# Altium PCB Copy of ACDC.PcbDoc (part 1 of 2)
Units mil, origin at the board's own origin, x right, y up, seen from the top; angles counter-clockwise.
Board outline 4750 x 3250 mil, 4 copper layers (Top Layer, Layer 1, Layer 2, Bottom Layer), stack 23.756 mil thick; 131 components, 94 nets, 665 pads, 112 vias.
Unrouted connection lines stored in the file: 74.
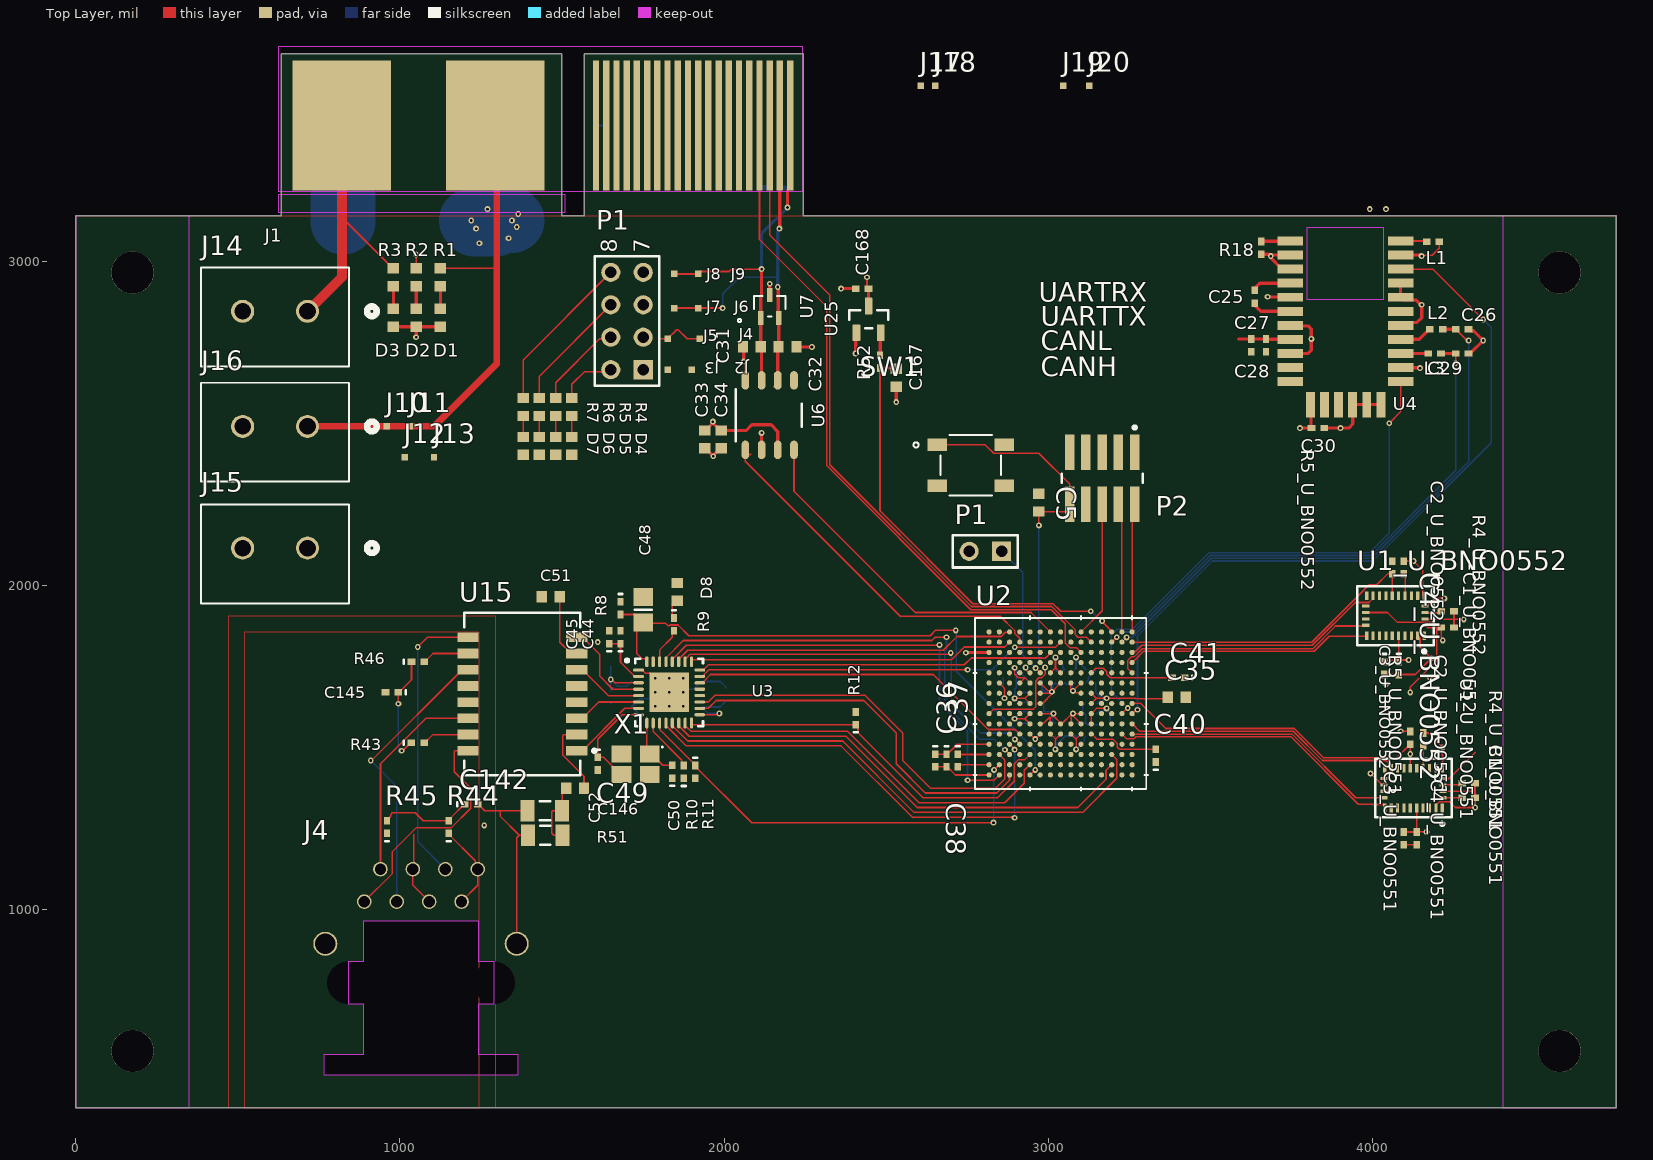
[diagram p0: Top Layer view]
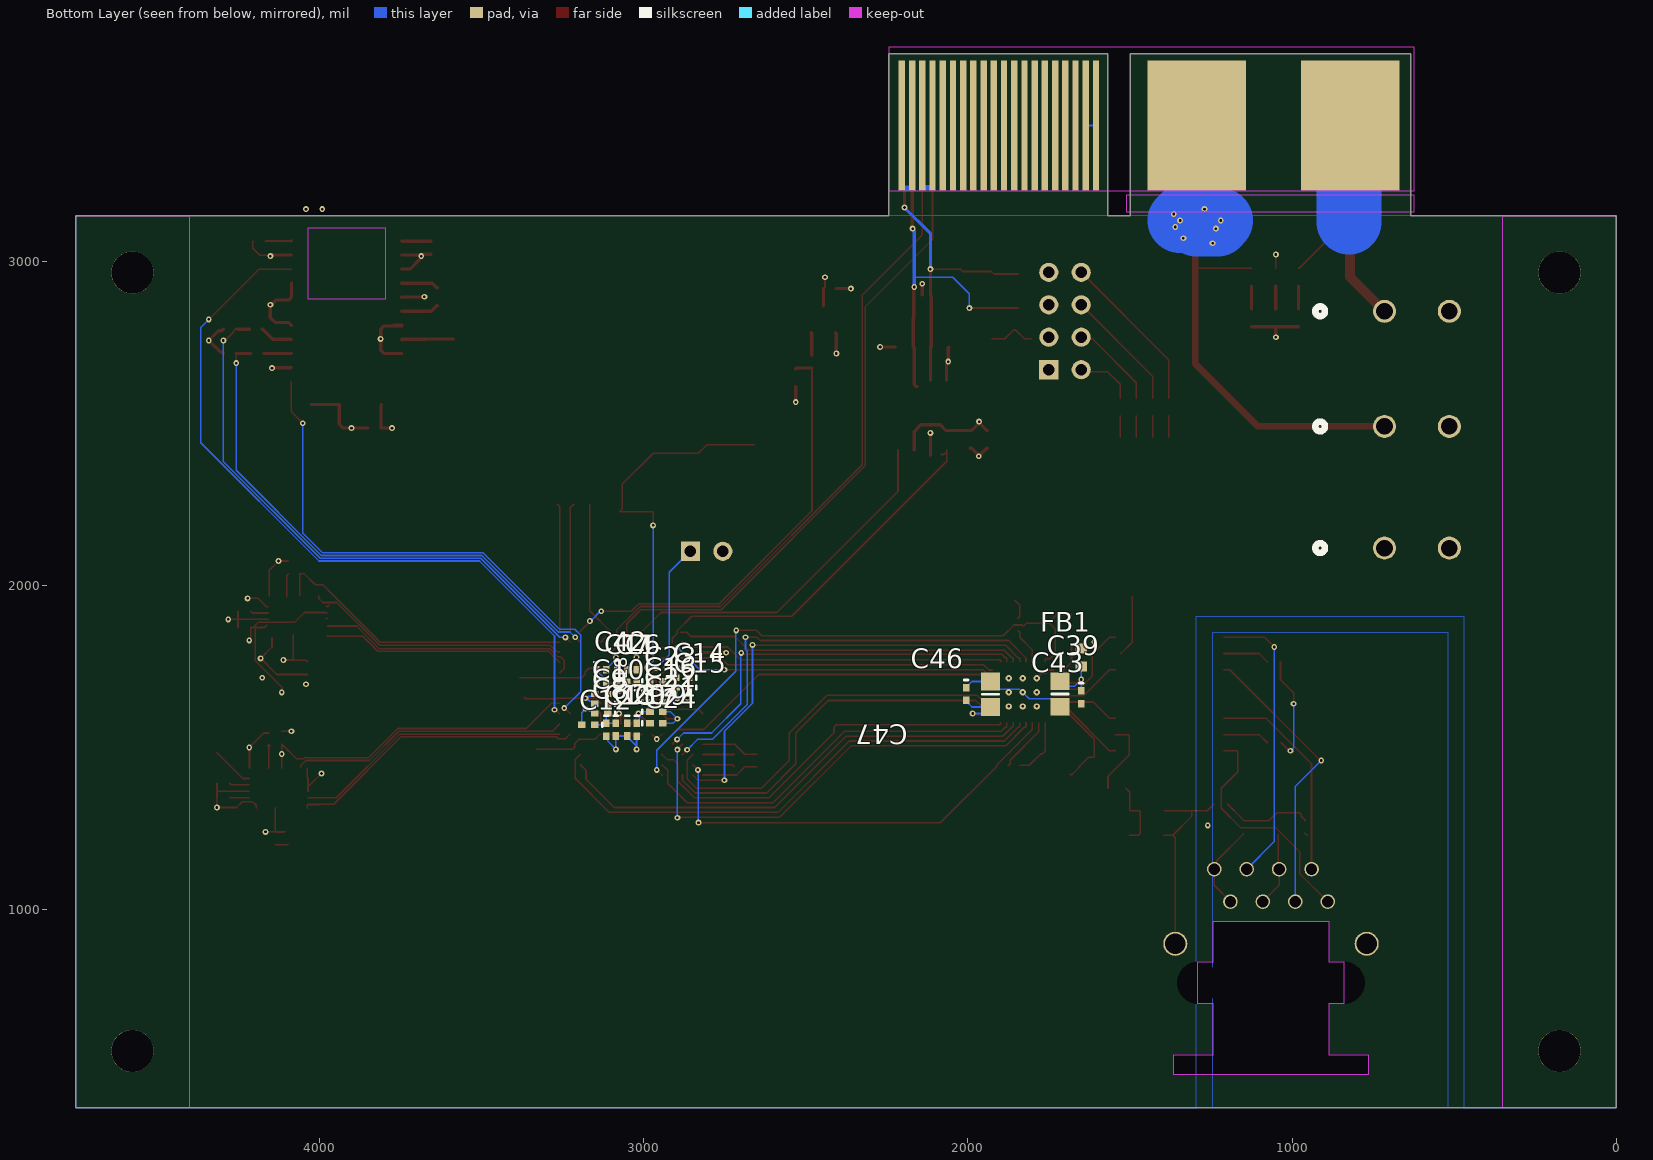
[diagram p1: Bottom Layer view, seen from below]
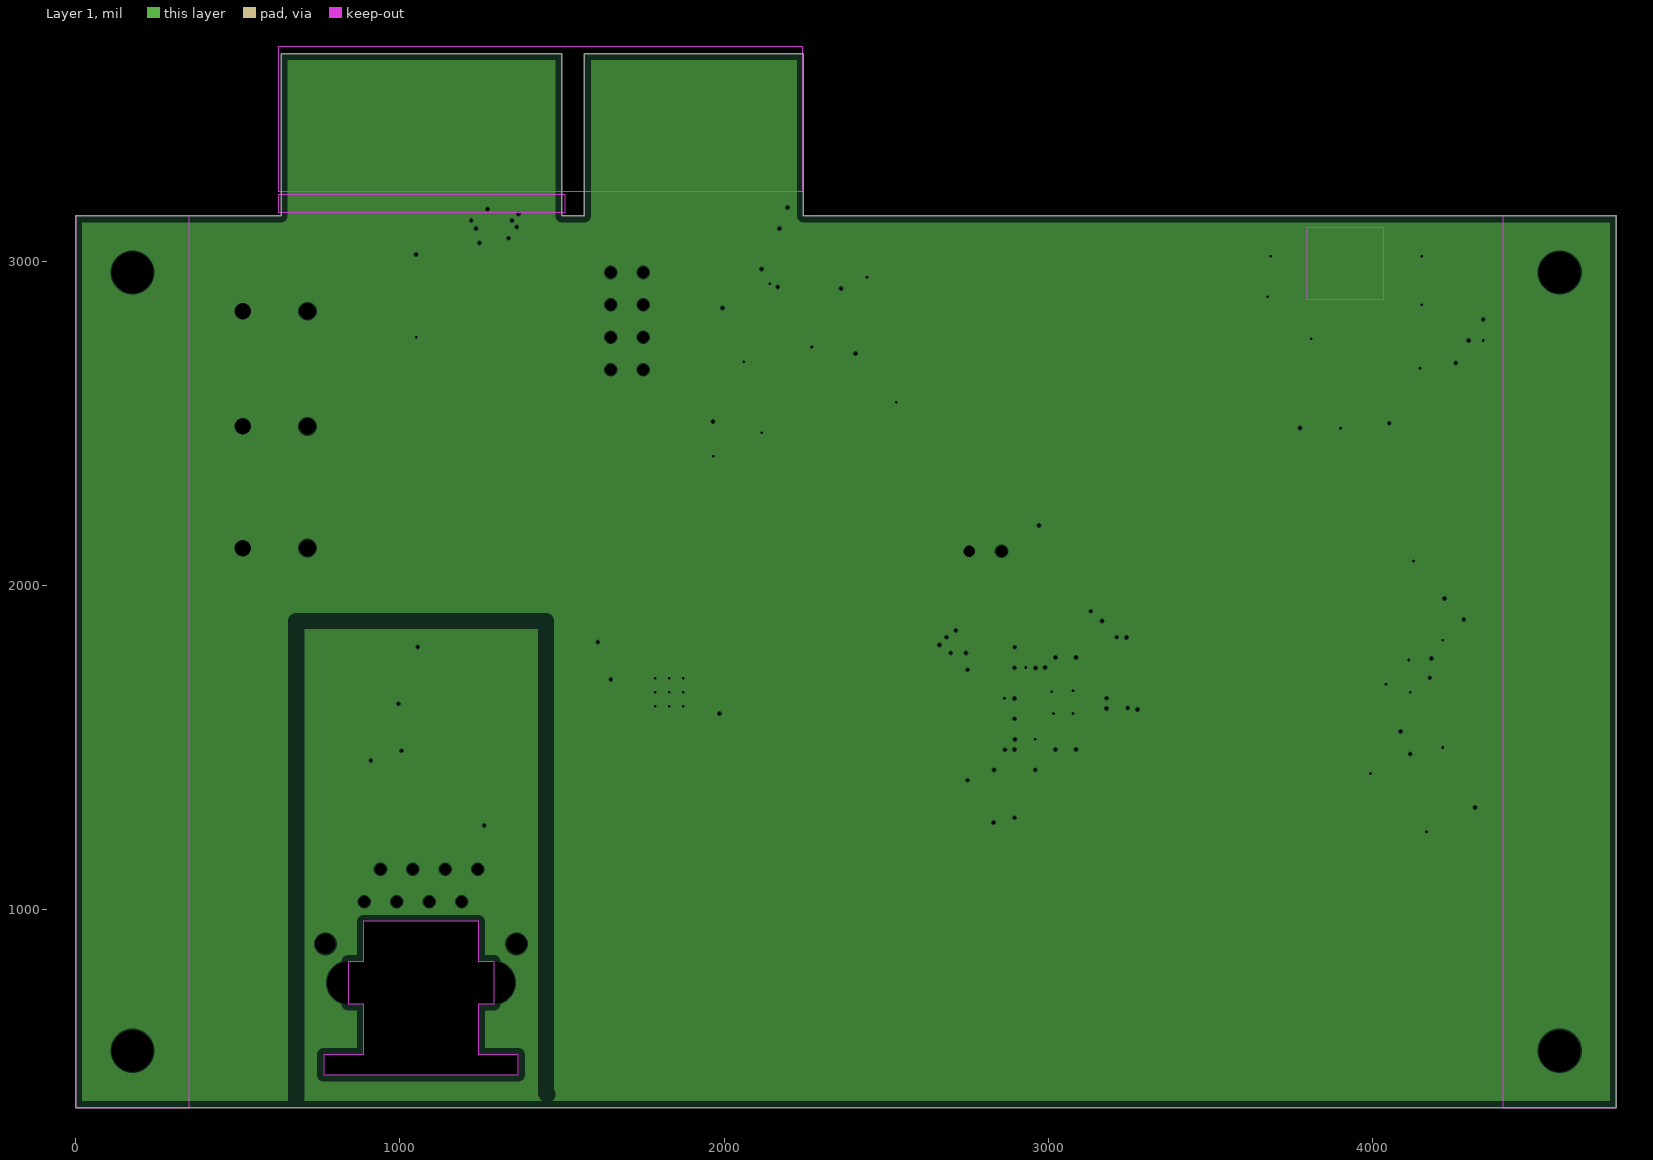
[diagram p2: Layer 1, clearances drawn from the general rule]
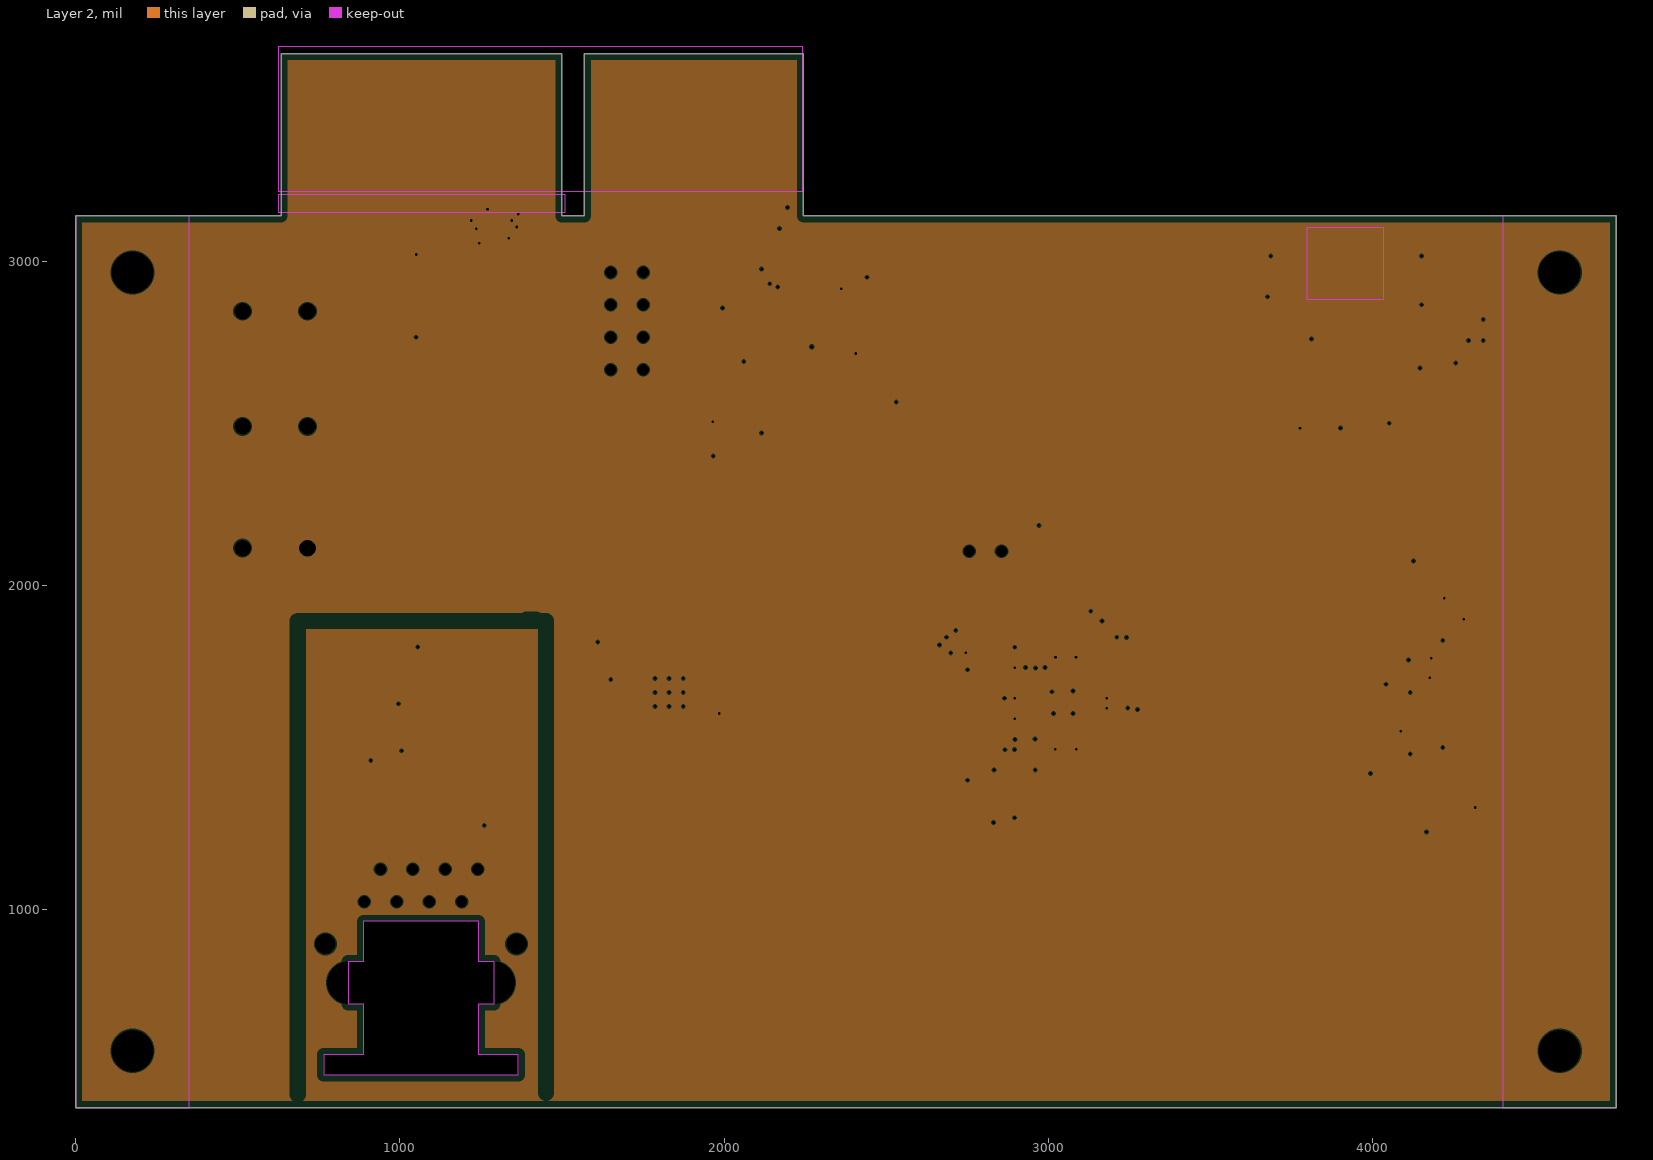
[diagram p3: Layer 2, clearances drawn from the general rule]

## Layer stack, top to bottom
Top Solder: solder mask 0.4, Solder Resist, Dk 3.5
Top Layer: signal copper 1.4
Dielectric 2: prepreg 2.8, PP-006, Dk 4.1
Layer 1: plane copper 1.378, net GND
Dielectric 1: dielectric 12.6, FR-4, Dk 4.8
Layer 2: plane copper 1.378, net 3V3
Dielectric 3: prepreg 2.8, PP-006, Dk 4.1
Bottom Layer: signal copper 1.4
Bottom Solder: solder mask 0.4, Solder Resist, Dk 3.5

## Board outline
0.5,389.5 0.5,3139.5 633.87,3139.5 633.87,3639.5 1498.87,3639.5 1498.87,3139.5 1568.87,3139.5 1568.87,3639.5 2243.86,3639.5 2243.86,3139.5 4750.5,3139.5 4750.5,389.5

## Design rules (kind name [scope] priority, off if disabled: settings)
BoardOutlineClearance [All] p1: gap=7.87 ignorepadtopadclearanceinfootprint=FALSE
Clearance [All] p1: gap=3.54 ignorepadtopadclearanceinfootprint=FALSE except(5: Arc-Via Track-Via SMDPad-Via THPad-Via Via-Via Via-Fill Via-Poly Via-Region Via-Text; 9.84: Arc-Hole Track-Hole SMDPad-Hole THPad-Hole Via-Hole Fill-Hole Poly-Hole Region-Hole Text-Hole)
ComponentClearance [All] p1: gap=3.5 collisioncheckmode=3 verticalgap=3.5 showdistances=TRUE
DiffPairsRouting 120OhmDiffPairs [InDifferentialPairClass('120Ohm')] p1: maxlimit=5 minlimit=5 mostfreqgap=5 substack1={5B3CBE88-527F-45CC-934D-B3D730501180} toplayer_{5b3cbe88-527f-45cc-934d-b3d730501180}_minwidth=15 toplayer_{5b3cbe88-527f-45cc-934d-b3d730501180}_maxwidth=15 toplayer_{5b3cbe88-527f-45cc-934d-b3d730501180}_prefwidth=15 bottomlayer_{5b3cbe88-527f-45cc-934d-b3d730501180}_minwidth=15 bottomlayer_{5b3cbe88-527f-45cc-934d-b3d730501180}_maxwidth=15 bottomlayer_{5b3cbe88-527f-45cc-934d-b3d730501180}_prefwidth=15 toplayer_minwidth=2.63 toplayer_maxwidth=2.63 toplayer_prefwidth=2.63 bottomlayer_minwidth=2.63 bottomlayer_maxwidth=2.63 bottomlayer_prefwidth=2.63 substack2={8099F0E5-E8A4-4C0B-B981-DA392BF8B1DC} toplayer_{8099f0e5-e8a4-4c0b-b981-da392bf8b1dc}_minwidth=15 toplayer_{8099f0e5-e8a4-4c0b-b981-da392bf8b1dc}_maxwidth=15 toplayer_{8099f0e5-e8a4-4c0b-b981-da392bf8b1dc}_prefwidth=15 bottomlayer_{8099f0e5-e8a4-4c0b-b981-da392bf8b1dc}_minwidth=15 bottomlayer_{8099f0e5-e8a4-4c0b-b981-da392bf8b1dc}_maxwidth=15 bottomlayer_{8099f0e5-e8a4-4c0b-b981-da392bf8b1dc}_prefwidth=15 substack3={670BDCB0-0926-4304-8001-FDB9BD357462} toplayer_{670bdcb0-0926-4304-8001-fdb9bd357462}_minwidth=15 toplayer_{670bdcb0-0926-4304-8001-fdb9bd357462}_maxwidth=15 toplayer_{670bdcb0-0926-4304-8001-fdb9bd357462}_prefwidth=15 bottomlayer_{670bdcb0-0926-4304-8001-fdb9bd357462}_minwidth=15 bottomlayer_{670bdcb0-0926-4304-8001-fdb9bd357462}_maxwidth=15 bottomlayer_{670bdcb0-0926-4304-8001-fdb9bd357462}_prefwidth=15 substack4={A201DB0F-6F31-4885-A301-8523EAE111D3} toplayer_{a201db0f-6f31-4885-a301-8523eae111d3}_minwidth=15 toplayer_{a201db0f-6f31-4885-a301-8523eae111d3}_maxwidth=15 toplayer_{a201db0f-6f31-4885-a301-8523eae111d3}_prefwidth=15 bottomlayer_{a201db0f-6f31-4885-a301-8523eae111d3}_minwidth=15 bottomlayer_{a201db0f-6f31-4885-a301-8523eae111d3}_maxwidth=15 bottomlayer_{a201db0f-6f31-4885-a301-8523eae111d3}_prefwidth=15 impedanceprofiledriven=TRUE impedanceprofileid={E287B070-1990-45AA-885F-49F5262516A6} maxuncoupledlength=500
DiffPairsRouting 100OhmDiffPairs [InDifferentialPairClass('100Ohm')] p2: maxlimit=5 minlimit=5 mostfreqgap=5 substack1={5B3CBE88-527F-45CC-934D-B3D730501180} toplayer_{5b3cbe88-527f-45cc-934d-b3d730501180}_minwidth=15 toplayer_{5b3cbe88-527f-45cc-934d-b3d730501180}_maxwidth=15 toplayer_{5b3cbe88-527f-45cc-934d-b3d730501180}_prefwidth=15 bottomlayer_{5b3cbe88-527f-45cc-934d-b3d730501180}_minwidth=15 bottomlayer_{5b3cbe88-527f-45cc-934d-b3d730501180}_maxwidth=15 bottomlayer_{5b3cbe88-527f-45cc-934d-b3d730501180}_prefwidth=15 toplayer_minwidth=4.51 toplayer_maxwidth=4.51 toplayer_prefwidth=4.51 bottomlayer_minwidth=4.51 bottomlayer_maxwidth=4.51 bottomlayer_prefwidth=4.51 substack2={8099F0E5-E8A4-4C0B-B981-DA392BF8B1DC} toplayer_{8099f0e5-e8a4-4c0b-b981-da392bf8b1dc}_minwidth=15 toplayer_{8099f0e5-e8a4-4c0b-b981-da392bf8b1dc}_maxwidth=15 toplayer_{8099f0e5-e8a4-4c0b-b981-da392bf8b1dc}_prefwidth=15 bottomlayer_{8099f0e5-e8a4-4c0b-b981-da392bf8b1dc}_minwidth=15 bottomlayer_{8099f0e5-e8a4-4c0b-b981-da392bf8b1dc}_maxwidth=15 bottomlayer_{8099f0e5-e8a4-4c0b-b981-da392bf8b1dc}_prefwidth=15 substack3={670BDCB0-0926-4304-8001-FDB9BD357462} toplayer_{670bdcb0-0926-4304-8001-fdb9bd357462}_minwidth=15 toplayer_{670bdcb0-0926-4304-8001-fdb9bd357462}_maxwidth=15 toplayer_{670bdcb0-0926-4304-8001-fdb9bd357462}_prefwidth=15 bottomlayer_{670bdcb0-0926-4304-8001-fdb9bd357462}_minwidth=15 bottomlayer_{670bdcb0-0926-4304-8001-fdb9bd357462}_maxwidth=15 bottomlayer_{670bdcb0-0926-4304-8001-fdb9bd357462}_prefwidth=15 substack4={A201DB0F-6F31-4885-A301-8523EAE111D3} toplayer_{a201db0f-6f31-4885-a301-8523eae111d3}_minwidth=15 toplayer_{a201db0f-6f31-4885-a301-8523eae111d3}_maxwidth=15 toplayer_{a201db0f-6f31-4885-a301-8523eae111d3}_prefwidth=15 bottomlayer_{a201db0f-6f31-4885-a301-8523eae111d3}_minwidth=15 bottomlayer_{a201db0f-6f31-4885-a301-8523eae111d3}_maxwidth=15 bottomlayer_{a201db0f-6f31-4885-a301-8523eae111d3}_prefwidth=15 impedanceprofiledriven=TRUE impedanceprofileid={2AE41D91-29D4-4592-BCE6-4F755B01D198} maxuncoupledlength=500
DiffPairsRouting 90OhmDiffPairs [InDifferentialPairClass('90Ohm')] p3: maxlimit=5 minlimit=5 mostfreqgap=5 substack1={5B3CBE88-527F-45CC-934D-B3D730501180} toplayer_{5b3cbe88-527f-45cc-934d-b3d730501180}_minwidth=15 toplayer_{5b3cbe88-527f-45cc-934d-b3d730501180}_maxwidth=15 toplayer_{5b3cbe88-527f-45cc-934d-b3d730501180}_prefwidth=15 bottomlayer_{5b3cbe88-527f-45cc-934d-b3d730501180}_minwidth=15 bottomlayer_{5b3cbe88-527f-45cc-934d-b3d730501180}_maxwidth=15 bottomlayer_{5b3cbe88-527f-45cc-934d-b3d730501180}_prefwidth=15 toplayer_minwidth=5.85 toplayer_maxwidth=5.85 toplayer_prefwidth=5.85 bottomlayer_minwidth=5.85 bottomlayer_maxwidth=5.85 bottomlayer_prefwidth=5.85 substack2={8099F0E5-E8A4-4C0B-B981-DA392BF8B1DC} toplayer_{8099f0e5-e8a4-4c0b-b981-da392bf8b1dc}_minwidth=15 toplayer_{8099f0e5-e8a4-4c0b-b981-da392bf8b1dc}_maxwidth=15 toplayer_{8099f0e5-e8a4-4c0b-b981-da392bf8b1dc}_prefwidth=15 bottomlayer_{8099f0e5-e8a4-4c0b-b981-da392bf8b1dc}_minwidth=15 bottomlayer_{8099f0e5-e8a4-4c0b-b981-da392bf8b1dc}_maxwidth=15 bottomlayer_{8099f0e5-e8a4-4c0b-b981-da392bf8b1dc}_prefwidth=15 substack3={670BDCB0-0926-4304-8001-FDB9BD357462} toplayer_{670bdcb0-0926-4304-8001-fdb9bd357462}_minwidth=15 toplayer_{670bdcb0-0926-4304-8001-fdb9bd357462}_maxwidth=15 toplayer_{670bdcb0-0926-4304-8001-fdb9bd357462}_prefwidth=15 bottomlayer_{670bdcb0-0926-4304-8001-fdb9bd357462}_minwidth=15 bottomlayer_{670bdcb0-0926-4304-8001-fdb9bd357462}_maxwidth=15 bottomlayer_{670bdcb0-0926-4304-8001-fdb9bd357462}_prefwidth=15 substack4={A201DB0F-6F31-4885-A301-8523EAE111D3} toplayer_{a201db0f-6f31-4885-a301-8523eae111d3}_minwidth=15 toplayer_{a201db0f-6f31-4885-a301-8523eae111d3}_maxwidth=15 toplayer_{a201db0f-6f31-4885-a301-8523eae111d3}_prefwidth=15 bottomlayer_{a201db0f-6f31-4885-a301-8523eae111d3}_minwidth=15 bottomlayer_{a201db0f-6f31-4885-a301-8523eae111d3}_maxwidth=15 bottomlayer_{a201db0f-6f31-4885-a301-8523eae111d3}_prefwidth=15 impedanceprofiledriven=TRUE impedanceprofileid={0AC2A555-4B6F-4755-A2BA-0C0075E72B6B} maxuncoupledlength=500
DiffPairsRouting [All] p4: maxlimit=3.54 minlimit=3.54 mostfreqgap=3.54 substack1={5B3CBE88-527F-45CC-934D-B3D730501180} toplayer_{5b3cbe88-527f-45cc-934d-b3d730501180}_minwidth=15 toplayer_{5b3cbe88-527f-45cc-934d-b3d730501180}_maxwidth=15 toplayer_{5b3cbe88-527f-45cc-934d-b3d730501180}_prefwidth=15 bottomlayer_{5b3cbe88-527f-45cc-934d-b3d730501180}_minwidth=15 bottomlayer_{5b3cbe88-527f-45cc-934d-b3d730501180}_maxwidth=15 bottomlayer_{5b3cbe88-527f-45cc-934d-b3d730501180}_prefwidth=15 toplayer_minwidth=3.54 toplayer_maxwidth=71497.94 toplayer_prefwidth=3.54 bottomlayer_minwidth=3.54 bottomlayer_maxwidth=71497.94 bottomlayer_prefwidth=3.54 substack2={8099F0E5-E8A4-4C0B-B981-DA392BF8B1DC} toplayer_{8099f0e5-e8a4-4c0b-b981-da392bf8b1dc}_minwidth=15 toplayer_{8099f0e5-e8a4-4c0b-b981-da392bf8b1dc}_maxwidth=15 toplayer_{8099f0e5-e8a4-4c0b-b981-da392bf8b1dc}_prefwidth=15 bottomlayer_{8099f0e5-e8a4-4c0b-b981-da392bf8b1dc}_minwidth=15 bottomlayer_{8099f0e5-e8a4-4c0b-b981-da392bf8b1dc}_maxwidth=15 bottomlayer_{8099f0e5-e8a4-4c0b-b981-da392bf8b1dc}_prefwidth=15 substack3={670BDCB0-0926-4304-8001-FDB9BD357462} toplayer_{670bdcb0-0926-4304-8001-fdb9bd357462}_minwidth=15 toplayer_{670bdcb0-0926-4304-8001-fdb9bd357462}_maxwidth=15 toplayer_{670bdcb0-0926-4304-8001-fdb9bd357462}_prefwidth=15 bottomlayer_{670bdcb0-0926-4304-8001-fdb9bd357462}_minwidth=15 bottomlayer_{670bdcb0-0926-4304-8001-fdb9bd357462}_maxwidth=15 bottomlayer_{670bdcb0-0926-4304-8001-fdb9bd357462}_prefwidth=15 substack4={A201DB0F-6F31-4885-A301-8523EAE111D3} toplayer_{a201db0f-6f31-4885-a301-8523eae111d3}_minwidth=15 toplayer_{a201db0f-6f31-4885-a301-8523eae111d3}_maxwidth=15 toplayer_{a201db0f-6f31-4885-a301-8523eae111d3}_prefwidth=15 bottomlayer_{a201db0f-6f31-4885-a301-8523eae111d3}_minwidth=15 bottomlayer_{a201db0f-6f31-4885-a301-8523eae111d3}_maxwidth=15 bottomlayer_{a201db0f-6f31-4885-a301-8523eae111d3}_prefwidth=15 maxuncoupledlength=500
Height [All] p1: minheight=0 maxheight=71497.94 prefheight=500
HoleSize [All] p1: absolutevalues=TRUE maxlimit=248.03 minlimit=7.87 maxpercent=80.000 minpercent=20.000
HoleToHoleClearance [All] p1: gap=9.84 allowstackedmicrovias=FALSE
MinimumAnnularRing [All] p1: minimumring=3
MinimumSolderMaskSliver [All] p1: minsoldermaskwidth=0
PlaneClearance [All] p1: clearance=3.5
PlaneConnect PlaneConnectPowerPads [InPadClass('PowerPads')] p1: planeconnectstyle=Direct reliefexpansion=20 reliefentries=4 reliefconductorwidth=10 reliefairgap=10
PlaneConnect [All] p2: pad.planeconnectstyle=Relief pad.reliefexpansion=11.81 pad.reliefentries=4 pad.reliefconductorwidth=3.5 pad.reliefairgap=3.5 via.planeconnectstyle=Direct via.reliefexpansion=11.81 via.reliefentries=4 via.reliefconductorwidth=5 via.reliefairgap=5
PolygonConnect PolygonConnectPowerPads [All vs (InPadClass('PowerPads'))] p1: connectstyle=Direct reliefconductorwidth=10 reliefentries=4 polygonreliefangle="90 Angle" airgapwidth=10
PolygonConnect [All] p2: thpad.connectstyle=Relief thpad.reliefconductorwidth=3.5 thpad.reliefentries=4 thpad.polygonreliefangle="90 Angle" thpad.airgapwidth=3.5 smdpad.connectstyle=Relief smdpad.reliefconductorwidth=3.5 smdpad.reliefentries=4 smdpad.polygonreliefangle="90 Angle" smdpad.airgapwidth=3.5 via.connectstyle=Direct via.reliefconductorwidth=5 via.reliefentries=4 via.polygonreliefangle="90 Angle" via.airgapwidth=5
ReturnPath 120OhmReturn [InDifferentialPairClass('120Ohm')] p1: impedanceprofileid={E287B070-1990-45AA-885F-49F5262516A6} _gaplimit=0 _useantipads=TRUE
ReturnPath 100OhmReturn [InDifferentialPairClass('100Ohm')] p2: impedanceprofileid={2AE41D91-29D4-4592-BCE6-4F755B01D198} _gaplimit=0 _useantipads=TRUE
ReturnPath 90OhmReturn [InDifferentialPairClass('90Ohm')] p3: impedanceprofileid={0AC2A555-4B6F-4755-A2BA-0C0075E72B6B} _gaplimit=0 _useantipads=TRUE
ReturnPath 60OhmReturn [InNetClass('60Ohm')] p4: impedanceprofileid={AA7C0548-6338-4AC9-AD2A-66174299CF1B} _gaplimit=0 _useantipads=TRUE
ReturnPath 50OhmReturn [InNetClass('50Ohm')] p5: impedanceprofileid={38A28C89-5808-4632-B31D-CFF1778F07F1} _gaplimit=0 _useantipads=TRUE
RoutingVias [All] p1: holewidth=7.87 width=17.72 viastyle="Through Hole" minholewidth=7.87 minwidth=17.72 maxholewidth=248.03 maxwidth=257.87
SilkToSilkClearance [All] p1: silktosilkclearance=0
SilkToSolderMaskClearance [IsPad] p1: minsilkscreentomaskgap=3.5 clearancetoexposedcopper=TRUE
SolderMaskExpansion ViaSolderMaskExpansion [IsVia] p1: expansion=4 istentingtop=TRUE
SolderMaskExpansion [All] p2: expansion=2.95 istentingtop=FALSE
Width 60OhmWidth [InNetClass('60Ohm')] p1: maxlimit=4.59 minlimit=4.59 preferedwidth=4.59 substack1={5B3CBE88-527F-45CC-934D-B3D730501180} substack2={8099F0E5-E8A4-4C0B-B981-DA392BF8B1DC} substack3={670BDCB0-0926-4304-8001-FDB9BD357462} substack4={A201DB0F-6F31-4885-A301-8523EAE111D3} impedanceprofiledriven=TRUE impedanceprofileid={AA7C0548-6338-4AC9-AD2A-66174299CF1B} minimp=50.000000 maximp=50.000000 favimp=50.000000
Width 50OhmWidth [InNetClass('50Ohm')] p2: maxlimit=6.79 minlimit=6.79 preferedwidth=6.79 substack1={5B3CBE88-527F-45CC-934D-B3D730501180} substack2={8099F0E5-E8A4-4C0B-B981-DA392BF8B1DC} substack3={670BDCB0-0926-4304-8001-FDB9BD357462} substack4={A201DB0F-6F31-4885-A301-8523EAE111D3} impedanceprofiledriven=TRUE impedanceprofileid={38A28C89-5808-4632-B31D-CFF1778F07F1} minimp=50.000000 maximp=50.000000 favimp=50.000000
Width [All] p3: maxlimit=71497.94 minlimit=3.54 preferedwidth=3.54 substack1={5B3CBE88-527F-45CC-934D-B3D730501180} substack2={8099F0E5-E8A4-4C0B-B981-DA392BF8B1DC} substack3={670BDCB0-0926-4304-8001-FDB9BD357462} substack4={A201DB0F-6F31-4885-A301-8523EAE111D3} minimp=50.000000 maximp=50.000000 favimp=50.000000
20 further rules are at their usual default settings.

## Classes and differential pairs
net class TXD[3..0]: TXD0 TXD1 TXD2 TXD3
net class RXD[3..0]: RXD0 RXD1 RXD2 RXD3
channel class BNO055: U_BNO0551 U_BNO0552
component class U_BNO0552: C1_U_BNO0552 C2_U_BNO0552 C3_U_BNO0552 C4_U_BNO0552 R4_U_BNO0552 R5_U_BNO0552 U1_U_BNO0552
component class U_BNO0551: C1_U_BNO0551 C2_U_BNO0551 C3_U_BNO0551 C4_U_BNO0551 R4_U_BNO0551 R5_U_BNO0551 U1_U_BNO0551
component class Designator: C5 C6 C7 C8 C9 C10 C11 C12 C13 C14 C15 C16 C17 C18 C19 C20 C21 C22 C23 C24 C35 C36 C37 C38 C40 C41 C42 P1 P2 SW1 U2

## Components (designator, comment, footprint, x,y, rotation, side; value= is the part's Value field where it differs from the comment)
C1_U_BNO0551 "Cap" 0402-A 4295,1345 r0 top value=100nF (schematic designator C1)
C1_U_BNO0552 "Cap" 0402-A 4230,1870 r0 top value=100nF (schematic designator C1)
C2_U_BNO0551 "Cap" 0402-A 4155,1525 r270 top value=100nF (schematic designator C2)
C2_U_BNO0552 "Cap" 0402-A 4095,2055 r270 top value=100nF (schematic designator C2)
C3_U_BNO0551 "Cap" 0402-A 4095,1220 r270 top value=100nF (schematic designator C3)
C3_U_BNO0552 "Cap" 0402-A 4035,1745 r270 top value=100nF (schematic designator C3)
C4_U_BNO0551 "Cap" 0402-A 4135,1220 r270 top value=6.8nF (schematic designator C4)
C4_U_BNO0552 "Cap" 0402-A 4080,1745 r270 top value=6.8nF (schematic designator C4)
C5 "Cap" 1608[0603] 2970,2255 r270 top value=100nF
C6 "Cap" 0402-A 3050,1720 r90 bottom value=100nF
C7 "Cap" 0402-A 3080,1720 r90 bottom value=100nF
C8 "Cap" 0402-A 3129.68,1605 r0 bottom value=100nF
C9 "Cap" 0402-A 3130,1635 r0 bottom value=100nF
C10 "Cap" 0402-A 3130,1665 r0 bottom value=100nF
C11 "Cap" 0402-A 3115,1720 r90 bottom value=100nF
C12 "Cap" 0402-A 3170,1570 r0 bottom value=100nF
C13 "Cap" 0402-A 3115,1555 r270 bottom value=100nF
C14 "Cap" 0402-A 2880.31,1715 r0 bottom value=100nF
C15 "Cap" 0402-A 2879.68,1685 r0 bottom value=100nF
C16 "Cap" 0402-A 2960,1670 r180 bottom value=100nF
C17 "Cap" 0402-A 3050,1555.32 r270 bottom value=100nF
C18 "Cap" 0402-A 3020,1720 r90 bottom value=100nF
C19 "Cap" 0402-A 3020,1555 r270 bottom value=100nF
C20 "Cap" 0402-A 3085,1555.32 r270 bottom value=100nF
C21 "Cap" 0402-A 2960,1610 r180 bottom value=100nF
C22 "Cap" 0402-A 2960,1640 r180 bottom value=100nF
C23 "Cap" 0402-A 2960.32,1705 r180 bottom value=100nF
C24 "Cap" 0402-A 2960,1575 r180 bottom value=100nF
C25 "Cap" 0402-A 3635,2890 r90 top value=22pF
C26 "Cap" 0402-A 4275,2790 r180 top value=22pF
C27 "Cap" 0402-A 3625,2740 r90 top value=22pF
C28 "Cap" 0402-A 3670,2740 r90 top value=2.2uF
C29 "Cap" 0402-A 4275,2715 r180 top value=22pF
C30 "Cap" 0402-A 3830,2485 r180 top value=22pF
C31 "Cap" 1608[0603] 2085,2735 r0 top value=100nF
C32 "Cap" 1608[0603] 2195,2735 r180 top value=100nF
C33 "Cap" 1608[0603] 1940,2450 r270 top value=100nF
C34 "Cap" 1608[0603] 1990,2450 r90 top value=1nF
C35 "Cap" 1608[0603] 3395,1655 r180 top value=4.7uF
C36 "Cap" 0402-A 2685,1460 r270 top value=100nF
C37 "Cap" 0402-A 2650,1460 r270 top value=1uF
C38 "Cap" 0402-A 2720,1460 r270 top value=100nF
C39 "Cap" 6-0805_M 1715,1665 r270 bottom value=22uF
C40 "Cap" 0402-A 3330,1475 r90 top value=2.2uF
C41 "Cap" 0402-A 3400,1715 r180 top value=2.2uF
C42 "Cap" 0402-A 3145,1720 r270 bottom value=100nF
C43 "Cap" 0402-A 1650,1655 r270 bottom value=100nF
C44 "Cap" 0402-A 1680,1840 r90 top value=100nF
C45 "Cap" 0402-A 1645,1840 r90 top value=2.2uF
C46 "Cap" 6-0805_M 1930,1664.37 r270 bottom value=22uF
C47 "Cap" 0402-A 2005,1665 r270 bottom value=100nF
C48 "Cap" 6-0805_M 1750,1925 r270 top value=10uF
C49 "Cap" 1608[0603] 1540,1375 r180 top value=100nF
C50 "Cap" 0402-A 1840,1425.31 r90 top value=33pF
C51 "Cap" 1608[0603] 1465,1965 r180 top value=100nF
C52 "Cap" 0402-A 1610,1450.32 r270 top value=33pF
C142 "Cap" 0402-A 1220,1325 r0 top value=10nF
C145 "Cap" 0402-A 975,1670 r180 top value=1nF
C146 "Cap" C1206 1446.85,1305 r180 top value=4.7nF
C167 "Cap" 1608[0603] 2530,2640 r270 top value=680pF
C168 "Cap" 0402-A 2425,2915 r0 top value=100nF
D1 "LED0" 1608[0603] 1125,2825 r270 top
D2 "LED0" 1608[0603] 1050,2825 r270 top
D3 "LED0" 1608[0603] 980,2825 r270 top
D4 "LED0" 1608[0603] 1530,2430 r270 top
D5 "LED0" 1608[0603] 1480,2430 r270 top
D6 "LED0" 1608[0603] 1430,2430 r270 top
D7 "LED0" 1608[0603] 1380,2430 r270 top
D8 "LED0" 1608[0603] 1855,1980 r270 top
FB1 "Ferrite Bead" 1608[0603] 1650,1777.56 r270 bottom value="100Ohm @ 100MHz"
J1 "HSEC8-120-01-L-PV-4-1" "HSEC8-120-01-L-PV-4-1 Gold Fingers" 1450,3435 r0 top
J2 "5029" "EXPOSED PAD 0.02X0.02" 1900,2665 r180 top
J3 "5029" "EXPOSED PAD 0.02X0.02" 1825,2665 r180 top
J4 "5029" "EXPOSED PAD 0.02X0.02" 1925,2760 r180 top
J4 "RJULE4218201" RJULE4218201 1065,775 r0 top locked
J5 "5029" "EXPOSED PAD 0.02X0.02" 1825,2760 r180 top
J6 "5029" "EXPOSED PAD 0.02X0.02" 1920,2855 r180 top
J7 "5029" "EXPOSED PAD 0.02X0.02" 1845,2855 r180 top
J8 "5029" "EXPOSED PAD 0.02X0.02" 1920,2960 r180 top
J9 "5029" "EXPOSED PAD 0.02X0.02" 1845,2960 r180 top
J10 "5029" "EXPOSED PAD 0.02X0.02" 960,2490 r90 top
J11 "5029" "EXPOSED PAD 0.02X0.02" 1030,2490 r90 top
J12 "5029" "EXPOSED PAD 0.02X0.02" 1015,2395 r90 top
J13 "5029" "EXPOSED PAD 0.02X0.02" 1105,2395 r90 top
J14 "OSTTC022162" CONN_OSTTC022162_OST 715,2845 r180 top
J15 "OSTTC022162" CONN_OSTTC022162_OST 715,2115 r180 top
J16 "OSTTC022162" CONN_OSTTC022162_OST 715,2490 r180 top
J17 "5029" "EXPOSED PAD 0.02X0.02" 2605,3540 r90 top
J18 "5029" "EXPOSED PAD 0.02X0.02" 2650,3540 r90 top
J19 "5029" "EXPOSED PAD 0.02X0.02" 3045,3540 r90 top
J20 "5029" "EXPOSED PAD 0.02X0.02" 3125,3540 r90 top
L1 "Inductor" 0402-A 4185,3060 r0 top value=1.8nH
L2 "Inductor" 0402-A 4195,2790 r0 top value=47nH
L3 "Inductor" 0402-A 4190,2715 r0 top value=47nH
P1 "Header 4X2" HDR2X4 1750,2665 r90 top
P1 "Header 2" HDR1X2 2855,2105 r180 top
P2 "SWD" SMTC-FTSH-105-01-L-DV-K_V 3165,2330 r180 top
R1 "Res1" 1608[0603] 1125,2950 r90 top value=470
R2 "Res1" 1608[0603] 1050,2950 r90 top value=470
R3 "Res1" 1608[0603] 980,2950 r90 top value=470
R4 "Res1" 1608[0603] 1530,2550 r90 top value=470
R4_U_BNO0551 "Res1" 0402-A 4295,1390 r180 top value=10k (schematic designator R4)
R4_U_BNO0552 "Res1" 0402-A 4230,1920 r180 top value=10k (schematic designator R4)
R5 "Res1" 1608[0603] 1480,2550 r90 top value=470
R5_U_BNO0551 "Res1" 0402-A 4115,1530 r90 top value=10k (schematic designator R5)
R5_U_BNO0552 "Res1" 0402-A 4060,2055 r90 top value=10k (schematic designator R5)
R6 "Res1" 1608[0603] 1430,2550 r90 top value=470
R7 "Res1" 1608[0603] 1380,2550 r90 top value=470
R8 "Res1" 0402-A 1680,1930 r270 top value=10k
R9 "Res1" 0402-A 1845,1879.69 r270 top value=220
R10 "Res1" 0402-A 1875,1424.68 r90 top value=6.49k
R11 "Res1" 0402-A 1910,1425 r270 top value=1k
R12 "Res1" 0402-A 2405,1590 r90 top value=1k
R18 "Res1" 0402-A 3655,3040.31 r90 top value=0
R43 "Res1" 0402-A 1055,1515 r0 top value=75
R44 "Res1" 0402-A 1150,1255 r90 top value=75
R45 "Res1" 0402-A 960,1255 r90 top value=75
R46 "Res1" 0402-A 1055.31,1765 r0 top value=75
R51 "Res1" C1206 1448.15,1230 r0 top value=1M
R52 "Res1" 0402-A 2480,2690 r270 top value=0
SW1 "PTS647SK38SMTR2LFS" PTS647SK38SMTR2LFS_CNK 2760,2370 r0 top
U1_U_BNO0551 "BNO055" FP-BNO055-MFG 4125,1375 r270 top (schematic designator U1)
U1_U_BNO0552 "BNO055" FP-BNO055-MFG 4069.21,1906.52 r270 top (schematic designator U1)
U2 "STM32F750N8H6" TFBGA216_13X13_STM 3037.01,1635.98 r0 top locked
U3 "KSZ8091MNXCA" KSZ8091MNXCA 1830,1670 r0 top locked
U4 "M20048-1" M20048-1 3807.6,2557.52 r0 top locked
U6 "TCAN334DR" D0008A_N 2140,2525 r90 top value=Value
U7 "D5V0L2B3W-7" SOT-323_DIO 2140,2860 r0 top
U15 "HX1188FNL" PULS-HX1188FNL-SMT-16_V 1377.52,1665 r90 top locked
U25 "TMP235AQDBZTQ1" FP-DBZ0003A-MFG 2445,2820 r90 top
X1 "25M20P2/XT324-10/10" 25M20P2/XT324-10/10 1726.69,1448.5 r180 top

## Footprints (in the part's own frame and the unit in brackets; to place one, negate y for a bottom-side part, rotate by r counter-clockwise, add the part's x,y. Pads: shape width x height; smd on the part's side, far side on the other; paste and mask are expansions set on the pad)
6-0805_M [mm] "Chip Resistor, Body 2.0x1.2mm, IPC Low Density"
  rect 1.4x1.5 smd: 1(-1,0) 2(1,0)
  silkscreen extent 0,-0.65 0,0.65, body extent -1.07,-0.7 1.07,0.7, height 0.7
25M20P2/XT324-10/10 [mm] "DFN, 4-Leads, Body 3.20x2.50mm, Pitch 1.60mm, IPC Medium Density"
  rect 1.55x1.3 smd: 1(-1.1,-0.8) 2(1.1,-0.8) 3(1.1,0.8) 4(-1.1,0.8)
  silkscreen extent -2.15,-1.4 -2.05,-1.3, body extent -1.7,-1.35 1.7,1.35, height 0.7
0402-A [mm] "Chip Inductor, Body 1.0x0.5mm, IPC High Density"
  rect 0.6x0.5 smd: 1(-0.5,0) 2(0.5,0)
  body extent -0.55,-0.3 0.55,0.3, height 0.55
1608[0603] [mm] "Chip Capacitor, Body 1.6x0.8mm, IPC High Density"
  rect 0.8x0.9 smd: 1(-0.7,0) 2(0.7,0)
  body extent -0.87,-0.48 0.87,0.48, height 1.3
C1206 [mm] "Chip Capacitor, Body 3.2x1.6mm, IPC High Density"
  rect 1.1x1.7 smd: 1(-1.35,0) 2(1.35,0)
  silkscreen extent -0.4,-0.75 0.4,0.75, body extent -1.7,-0.9 1.7,0.9, height 1.3
CONN_OSTTC022162_OST [mil]
  round 71 hole 51 mask+0: 1(0,0) 2(200,0)
  silkscreen extent -214,-135 328,170, body extent 0,0 10,10, height 10
D0008A_N [mm]
  oval 1.45x0.6 smd paste+0 mask+0.051: 1(-2.725,1.905) 2(-2.725,0.635) 3(-2.725,-0.635) 4(-2.725,-1.905) 5(2.725,-1.905) 6(2.725,-0.635) 7(2.725,0.635) 8(2.725,1.905)
  silkscreen extent -2.04,-2.5 2.03,2.67, body extent 0,0 0.25,0.25, height 0.25
"EXPOSED PAD 0.02X0.02" [mil]
  rect 20x20 smd: 1(0,0)
FP-BNO055-MFG [mm]
  rect 0.675x0.25 smd paste+0 mask+0: 1(1.562,2.25) 6(-1.562,2.25) 7(-1.562,1.75) 8(-1.562,1.25) 9(-1.562,0.75) 10(-1.562,0.25) 11(-1.562,-0.25) 12(-1.562,-0.75) 13(-1.562,-1.25) 14(-1.562,-1.75) 15(-1.562,-2.25) 20(1.562,-2.25) 21(1.562,-1.75) 22(1.562,-1.25) 23(1.562,-0.75) 24(1.562,-0.25) 25(1.562,0.25) 26(1.562,0.75) 27(1.562,1.25) 28(1.562,1.75)
  rect 0.25x0.575 smd paste+0 mask+0: 2(0.75,2.312) 3(0.25,2.312) 4(-0.25,2.312) 5(-0.75,2.312) 16(-0.75,-2.312) 17(-0.25,-2.312) 18(0.25,-2.312) 19(0.75,-2.312)
  silkscreen extent -2.3,-3 2.92,3
FP-DBZ0003A-MFG [mm]
  rrect17% 1.3x0.6 smd paste+0 mask+0: 1(-1.05,0.95) 2(-1.05,-0.95) 3(1.05,0)
  silkscreen extent -0.7,-1.52 0.7,1.52, body extent -1.8,-1.62 1.8,1.62, height 0.25
HDR1X2 [mm] "Connector; Header; 2 Position"
  rect 1.5x1.5 hole 0.9: 1(0,0)
  round 1.5 hole 0.9: 2(2.54,0)
  silkscreen extent -1.27,-1.27 3.81,1.27
HDR2X4 [mm] "Connector; Header; 4x2 Position"
  rect 1.5x1.5 hole 0.9: 1(0,0)
  round 1.5 hole 0.9: 2(0,2.54) 3(2.54,0) 4(2.54,2.54) 5(5.08,0) 6(5.08,2.54) 7(7.62,0) 8(7.62,2.54)
  silkscreen extent -1.27,-1.27 8.89,3.81
"HSEC8-120-01-L-PV-4-1 Gold Fingers" [mil]
  rect 303x400 smd paste-400: 0(-629,-17.25) 1(-156,-17.25)
  rect 19.68x400 smd paste-400: 2(154.5,-17.25) 3(186,-17.25) 4(217.5,-17.25) 5(249,-17.25) 6(280.5,-17.25) 7(312,-17.25) 8(343.5,-17.25) 9(375,-17.25) 10(406.5,-17.25) 11(438,-17.25) 12(469.5,-17.25) 13(501,-17.25) 14(532.5,-17.25) 15(564,-17.25) 16(595.5,-17.25) 17(627,-17.25) 18(658.5,-17.25) 19(690,-17.25) 20(721.5,-17.25) 21(753,-17.25)
  rect 303x400 smd far side paste-400: 22(-629,-17.25) 23(-156,-17.25)
  rect 19.68x400 smd far side paste-400: 24(154.5,-17.25) 25(186,-17.25) 26(217.5,-17.25) 27(249,-17.25) 28(280.5,-17.25) 29(312,-17.25) 30(343.5,-17.25) 31(375,-17.25) 32(406.5,-17.25) 33(438,-17.25) 34(469.5,-17.25) 35(501,-17.25) 36(532.5,-17.25) 37(564,-17.25) 38(595.5,-17.25) 39(627,-17.25) 40(658.5,-17.25) 41(690,-17.25) 42(721.5,-17.25) 43(753,-17.25)
  Keep-Out Layer region: -825,-220 792.61,-220 792.61,225 -825,225
  Keep-Out Layer region: -825,-285 60,-285 60,-230 -825,-230
KSZ8091MNXCA [mm] "QFN, 32-Leads, Body 5.00x5.00mm, Pitch 0.50mm, Thermal Pad 3.10x3.10mm, IPC Medium Density"
  oval 0.85x0.25 smd: 1(-2.4,1.75) 2(-2.4,1.25) 3(-2.4,0.75) 4(-2.4,0.25) 5(-2.4,-0.25) 6(-2.4,-0.75) 7(-2.4,-1.25) 8(-2.4,-1.75) 17(2.4,-1.75) 18(2.4,-1.25) 19(2.4,-0.75) 20(2.4,-0.25) 21(2.4,0.25) 22(2.4,0.75) 23(2.4,1.25) 24(2.4,1.75)
  oval 0.25x0.85 smd: 9(-1.75,-2.4) 10(-1.25,-2.4) 11(-0.75,-2.4) 12(-0.25,-2.4) 13(0.25,-2.4) 14(0.75,-2.4) 15(1.25,-2.4) 16(1.75,-2.4) 25(1.75,2.4) 26(1.25,2.4) 27(0.75,2.4) 28(0.25,2.4) 29(-0.25,2.4) 30(-0.75,2.4) 31(-1.25,2.4) 32(-1.75,2.4)
  rect 3.1x3.1 smd: 33(0,0)
  silkscreen extent -3.42,-2.65 2.65,2.65, body extent -2.5,-2.5 2.5,2.5, height 1
M20048-1 [mm]
  rect 2x0.7 smd: 1(-1.59,12.806) 2(-1.59,11.704) 3(-1.59,10.604) 4(-1.59,9.504) 5(-1.59,8.4) 6(-1.59,7.302) 7(-1.59,6.202) 8(-1.59,5.1) 9(-1.59,4) 10(-1.59,2.9) 11(-1.59,1.8) 18(7.05,1.8) 19(7.05,2.9) 20(7.05,4) 21(7.05,5.1) 22(7.05,6.202) 23(7.05,7.302) 24(7.05,8.4) 25(7.05,9.504) 26(7.05,10.604) 27(7.05,11.704) 28(7.05,12.806)
  rect 0.7x2 smd: 12(0,0) 13(1.1,0) 14(2.2,0) 15(3.3,0) 16(4.4,0) 17(5.5,0)
  Keep-Out Layer region: -0.285,8.255 5.715,8.255 5.715,13.843 -0.285,13.843
PTS647SK38SMTR2LFS_CNK [mil]
  rect 61x39 smd paste+0 mask+0: 1(-103.35,62.99) 2(103.35,62.99) 3(-103.35,-62.99) 4(103.35,-62.99)
  silkscreen extent -177,-94 94,94, body extent 0,0 10,10, height 10
PULS-HX1188FNL-SMT-16_V [mm] "SMD, 16-Leads, Body 12.7x9.09mm, Pitch 1.27mm"
  rect 0.76x1.65 smd: 1(-4.445,-4.255) 2(-3.175,-4.255) 3(-1.905,-4.255) 4(-0.635,-4.255) 5(0.635,-4.255) 6(1.905,-4.255) 7(3.175,-4.255) 8(4.445,-4.255) 9(4.445,4.255) 10(3.175,4.255) 11(1.905,4.255) 12(0.635,4.255) 13(-0.635,4.255) 14(-1.905,4.255) 15(-3.175,4.255) 16(-4.445,4.255)
  silkscreen extent -6.35,-5.75 6.35,4.54, body extent -6.35,-4.54 6.35,4.54, height 5.99
RJULE4218201 [mil]
  round 45 hole 35: 1(-175,250) 2(-125,350) 3(-75,250) 4(-25,350) 5(25,250) 6(75,350) 7(125,250) 8(175,350)
  round 74 hole 64: 9(-295,120) 10(295,120)
  round 74 hole 130 unplated: 11(-225,0) 11(225,0)
  Keep-Out Layer board cut-out: -177.5,189 -177.5,65 -225,65 -225,-65 -177.5,-65 -177.5,-222 -300.5,-222 -300.5,-284 300.5,-284 300.5,-222 177.5,-222 177.5,-65 225,-65 225,65 177.5,65 177.5,189
  body extent -372,-348 372,410, height 376
SMTC-FTSH-105-01-L-DV-K_V [mm] "CONN, 10-Leads, Body 6.35x3.43mm, Pitch 1.27mm"
  rect 0.74x2.79 smd: 1(-2.54,-2.035) 2(-2.54,2.035) 3(-1.27,-2.035) 4(-1.27,2.035) 5(0,-2.035) 6(0,2.035) 7(1.27,-2.035) 8(1.27,2.035) 9(2.54,-2.035) 10(2.54,2.035)
  silkscreen extent -3.17,-4.1 3.17,0.34, body extent -3.17,-2.92 3.18,2.92, height 6.12
SOT-323_DIO [mm]
  rect 0.451x1.111 smd paste+0 mask+0: 1(-0.7,-0.9) 2(0.7,-0.9) 3(0,0.9)
  silkscreen extent -2.5,-1.23 1.23,0.8, body extent 0,0 0.25,0.25, height 0.25
TFBGA216_13X13_STM [mil]
  round 16 smd paste+0 mask+0: A1(-220.47,220.47) A2(-188.98,220.47) A3(-157.48,220.47) A4(-125.98,220.47) A5(-94.49,220.47) A6(-62.99,220.47) A7(-31.5,220.47) A8(0,220.47) A9(31.5,220.47) A10(62.99,220.47) A11(94.49,220.47) A12(125.98,220.47) A13(157.48,220.47) A14(188.98,220.47) A15(220.47,220.47) B1(-220.47,188.98) B2(-188.98,188.98) B3(-157.48,188.98) B4(-125.98,188.98) B5(-94.49,188.98) B6(-62.99,188.98) B7(-31.5,188.98) B8(0,188.98) B9(31.5,188.98) B10(62.99,188.98) B11(94.49,188.98) B12(125.98,188.98) B13(157.48,188.98) B14(188.98,188.98) B15(220.47,188.98) C1(-220.47,157.48) C2(-188.98,157.48) C3(-157.48,157.48) C4(-125.98,157.48) C5(-94.49,157.48) C6(-62.99,157.48) C7(-31.5,157.48) C8(0,157.48) C9(31.5,157.48) C10(62.99,157.48) C11(94.49,157.48) C12(125.98,157.48) C13(157.48,157.48) C14(188.98,157.48) C15(220.47,157.48) D1(-220.47,125.98) D2(-188.98,125.98) D3(-157.48,125.98) D4(-125.98,125.98) D5(-94.49,125.98) D6(-62.99,125.98) D7(-31.5,125.98) D8(0,125.98) D9(31.5,125.98) D10(62.99,125.98) D11(94.49,125.98) D12(125.98,125.98) D13(157.48,125.98) D14(188.98,125.98) D15(220.47,125.98) E1(-220.47,94.49) E2(-188.98,94.49) E3(-157.48,94.49) E4(-125.98,94.49) E5(-94.49,94.49) E6(-62.99,94.49) E7(-31.5,94.49) E8(0,94.49) E9(31.5,94.49) E10(62.99,94.49) E11(94.49,94.49) E12(125.98,94.49) E13(157.48,94.49) E14(188.98,94.49) E15(220.47,94.49) F1(-220.47,62.99) F2(-188.98,62.99) F3(-157.48,62.99) F4(-125.98,62.99) F5(-94.49,62.99) F6(-62.99,62.99) F7(-31.5,62.99) F8(0,62.99) F9(31.5,62.99) F10(62.99,62.99) F11(94.49,62.99) F12(125.98,62.99) F13(157.48,62.99) F14(188.98,62.99) F15(220.47,62.99) G1(-220.47,31.5) G2(-188.98,31.5) G3(-157.48,31.5) G4(-125.98,31.5) G5(-94.49,31.5) G6(-62.99,31.5) G10(62.99,31.5) G11(94.49,31.5) G12(125.98,31.5) G13(157.48,31.5) G14(188.98,31.5) G15(220.47,31.5) H1(-220.47,0) H2(-188.98,0) H3(-157.48,0) H4(-125.98,0) H5(-94.49,0) H6(-62.99,0) H10(62.99,0) H11(94.49,0) H12(125.98,0) H13(157.48,0) H14(188.98,0) H15(220.47,0) J1(-220.47,-31.5) J2(-188.98,-31.5) J3(-157.48,-31.5) J4(-125.98,-31.5) J5(-94.49,-31.5) J6(-62.99,-31.5) J10(62.99,-31.5) J11(94.49,-31.5) J12(125.98,-31.5) J13(157.48,-31.5) J14(188.98,-31.5) J15(220.47,-31.5) K1(-220.47,-62.99) K2(-188.98,-62.99) K3(-157.48,-62.99) K4(-125.98,-62.99) K5(-94.49,-62.99) K6(-62.99,-62.99) K7(-31.5,-62.99) K8(0,-62.99) K9(31.5,-62.99) K10(62.99,-62.99) K11(94.49,-62.99) K12(125.98,-62.99) K13(157.48,-62.99) K14(188.98,-62.99) K15(220.47,-62.99) L1(-220.47,-94.49) L2(-188.98,-94.49) L3(-157.48,-94.49) L4(-125.98,-94.49) L5(-94.49,-94.49) L6(-62.99,-94.49) L7(-31.5,-94.49) L8(0,-94.49) L9(31.5,-94.49) L10(62.99,-94.49) L11(94.49,-94.49) L12(125.98,-94.49) L13(157.48,-94.49) L14(188.98,-94.49) L15(220.47,-94.49) M1(-220.47,-125.98) M2(-188.98,-125.98) M3(-157.48,-125.98) M4(-125.98,-125.98) M5(-94.49,-125.98) M6(-62.99,-125.98) M7(-31.5,-125.98) M8(0,-125.98) M9(31.5,-125.98) M10(62.99,-125.98) M11(94.49,-125.98) M12(125.98,-125.98) M13(157.48,-125.98) M14(188.98,-125.98) M15(220.47,-125.98) N1(-220.47,-157.48) N2(-188.98,-157.48) N3(-157.48,-157.48) N4(-125.98,-157.48) N5(-94.49,-157.48) N6(-62.99,-157.48) N7(-31.5,-157.48) N8(0,-157.48) N9(31.5,-157.48) N10(62.99,-157.48) N11(94.49,-157.48) N12(125.98,-157.48) N13(157.48,-157.48) N14(188.98,-157.48) N15(220.47,-157.48) P1(-220.47,-188.98) P2(-188.98,-188.98) P3(-157.48,-188.98) P4(-125.98,-188.98) P5(-94.49,-188.98) P6(-62.99,-188.98) P7(-31.5,-188.98) P8(0,-188.98) P9(31.5,-188.98) P10(62.99,-188.98) P11(94.49,-188.98) P12(125.98,-188.98) P13(157.48,-188.98) P14(188.98,-188.98) P15(220.47,-188.98) R1(-220.47,-220.47) R2(-188.98,-220.47) R3(-157.48,-220.47) R4(-125.98,-220.47) R5(-94.49,-220.47) R6(-62.99,-220.47) R7(-31.5,-220.47) R8(0,-220.47) R9(31.5,-220.47) R10(62.99,-220.47) R11(94.49,-220.47) R12(125.98,-220.47) R13(157.48,-220.47) R14(188.98,-220.47) R15(220.47,-220.47)
  silkscreen extent -269,-269 269,269, body extent 0,0 10,10, height 10

## Part data
C1_U_BNO0551 C1_U_BNO0552 C2_U_BNO0551 C2_U_BNO0552 C3_U_BNO0551 C3_U_BNO0552 C4_U_BNO0551 C4_U_BNO0552 C5 C6 C7 C8 C9 C10 C11 C12 C13 C14 C15 C16 C17 C18 C19 C20 C21 C22 C23 C24 C25 C26 C27 C28 C29 C30 C31 C32 C33 C34 C35 C36 C37 C38 C39 C40 C41 C42 C43 C44 C45 C46 C47 C49 C145 C146 C167 C168: "Capacitor", LatestRevisionDate=17-Jul-2002, LatestRevisionNote="Re-released for DXP Platform.", PackageDescription="Radial Cap, Thru-Hole; 2 Leads; 0.3 in Pin Spacing", PackageReference=RAD-0.3, Published=8-Jun-2000, Publisher="Altium Limited"
C48 C50 C51 C52 C142: "Capacitor", Supplier Part Number 1=490-3295-1-ND, LatestRevisionDate=17-Jul-2002, LatestRevisionNote="Re-released for DXP Platform.", PackageDescription="Radial Cap, Thru-Hole; 2 Leads; 0.3 in Pin Spacing", PackageReference=RAD-0.3, Published=8-Jun-2000, Publisher="Altium Limited", Supplier 1=Digi-Key
FB1: library part Inductor, "Inductor", Code_IEC=1005, Code_JEITA=0402, LatestRevisionDate=29-May-2009, LatestRevisionNote="IPC-7351 Footprint Added.", PackageDescription="Chip Inductor", PackageReference=0402-A, Published=8-Jun-2000, Publisher="Altium Limited"
J14 J15 J16 SW1 U2 U7: "No Description Available", Copyright="Copyright (C) 2018 Accelerated Designs. All rights reserved", RefDes=RefDes, Type=DEV
  J14 J15 J16: Built_By=EMA_Cory, Manufacturer_Part_Number=OSTTC022162, SourceLibrary=On_Shore_Technology_2019-12-02, Vendor="On Shore Technology Inc"
  SW1: Built_By=EMA_Cory, Datasheet=https://www.ckswitches.com/media/2567/pts647.pdf, Manufacturer_Part_Number=PTS647SK38SMTR2LFS, SourceLibrary=C&K_2020-05-06, Vendor=C&K
  U2: Built_By=EMA_Jessica, Manufacturer_Part_Number=STM32F750N8H6, SourceLibrary=Add_to_database_2020-10-19, Vendor=STMicroelectronics
  U7: Built_By=EMA_UL_Team, Manufacturer_Part_Number=D5V0L2B3W-7, SourceLibrary=DIODESINC_2_2015-08-18, Vendor="Diodes Inc"
P1: "Header, 4-Pin, Dual row", LatestRevisionDate=17-Jul-2002, LatestRevisionNote="Re-released for DXP Platform.", Publisher="Altium Limited"
P1: "Header, 2-Pin", LatestRevisionDate=17-Jul-2002, LatestRevisionNote="Re-released for DXP Platform.", Publisher="Altium Limited"
P2: library part CMP-2000-05353-1, "Male Header, Pitch 1.27 mm, 2 x 5 Position, Height 6.25 mm", Color=Black, Manufacturer=Samtec, Package Description="Male Header, Pitch 1.27 mm, 2 x 5 Position, Height 5.97 mm, Tail Length 4.32 mm", Package Reference=FTSH-105-01-L-DV-K, Standard Package=1, Category=Connectors,Interconnects, Connector Type=Header,Unshrouded, Contact Finish=Gold, Contact Finish Thickness=10µin(0.25µm), Contact Mating Length="0.120\"(3.05mm)", Contact Type=MalePin, Datasheet URL=http://suddendocs.samtec.com/prints/ftsh-1xx-xx-xxx-dv-xxx-mkt.pdf, Datasheet Version="Rev. ET, 10/1995", Family=RectangularConnectors-Headers,MalePins, Manufacturer URL=http://www.samtec.com/, Mating Products="SFMC-105-L2-S-D-TR-ND / -CONN.05\"SURFACE10POSSMT / FLE-105-01-G-DV-TR-ND / -CONNSKT1.27MM10POSDUALSMD / FLE-105-01-G-DV-A-P-ND / -CONNSKT1.27MM10POSDUALSMD / FLE-105-01-G-DV-A-ND / -CONNSKT1.27MM10POSDUALSMD / CLP-105-02-G-D-P-TR-ND / -CONNRCPT10POSDUAL.05\"SMD / SAM1155-05-ND / -CONNRCPT10POSDUAL.05\"SMD / SAM1154-05-ND / -CONNRCPT10POSDUAL.05\"SMD / SAM1153-05-ND / -CONNRCPT10POSDUAL.05\"SMD / SAM1226-05-ND / -CONNRCPT.05\"10POSDUALSMD", Mounting Type=SurfaceMount, Number of Positions=10, Number of Positions Loaded=All, Number of Rows=2, Other Names=Q3937619, Package URL=http://suddendocs.samtec.com/prints/ftsh-1xx-xx-xxx-dv-xxx-footprint.pdf, Packaging=Tube, Pitch="0.050\"(1.27mm)", Product Training Modules=Board-to-BoardConnectors, Row Spacing="0.050\"(1.27mm)", Series=FTSH, Termination=Solder
R1 R2 R3 R4 R4_U_BNO0551 R4_U_BNO0552 R5 R5_U_BNO0551 R5_U_BNO0552 R6 R7 R8 R9 R10 R11 R12 R18 R43 R44 R45 R46 R51 R52: "Resistor", LatestRevisionDate=17-Jul-2002, LatestRevisionNote="Re-released for DXP Platform.", PackageDescription="Axial Device, Thru-Hole; 2 Leads; 0.3 in Pin Spacing", PackageReference=AXIAL-0.3, Published=8-Jun-2000, Publisher="Altium Limited"
U1_U_BNO0551 U1_U_BNO0552: library part CMP-191067-000002-1, "IMU ACCEL/GYRO/MAG I2C 28LGA", Ambient Temperature Range High=+85°C, Ambient Temperature Range Low=-40°C, Manufacturer="Bosch Sensortech", Max Supply Voltage=3.6V, Min Supply Voltage=1.7V, Operating Supply Current=12.3mA, Package=0, Temperature="-40°C to +85°C", Voltage=1.7~3.6V, Accel Range=2/4/8/16g, Accel Resolution=14bits, Accel Sensitivity=0.001LSB/g, Automotive=No, Category=IC, ComponentLink2Description=Datasheet, ComponentLink2URL=https://ae-bst.resource.bosch.com/media/_tech/media/datasheets/BST-BNO055-DS000.pdf, Device Class L1=Sensors, Device Class L2="Motion Sensors", Device Class L3="Inertial Measurement Units (IMUs)", Digikey Description="IMU ACCEL/GYRO/MAG I2C 28LGA", Gyro Range=125/250/500/1000/2000°/s, Gyro Sensitivity=16LSB/°/s, Height=1.18mm, Lead Free=Yes, Mag Sense Range=1300-2500uT, Manufacturer Part Number=BNO055, Mouser Description="BNO055 Series 1.7 to 3.6 V Intelligent 9-Axis Absolute Orientation Sensor-LGA-28", Octopart=https://octopart.com/bno055-bosch+sensortec-50309911, RoHS=TRUE, Sensor Output=I2C,UART, Sensor Type=Accelerometer,Gyroscope,Magnetometer, Temperature Range High=+85°C, Temperature Range Low=-40°C
U6: "No Description Available", Manufacturer="Texas Instruments", Copyright="Copyright (C) 2018 Accelerated Designs. All rights reserved", PartNumber=TCAN334DR, RefDes=RefDes, Type=DEV
U15: library part CMP-2000-06431-1, "Telecom Transformer 1:1/1:1, -40 to 85 degC, 16-Pin SMT, RoHS, Tube", Manufacturer="Pulse Electronics", Package Description="16-Pin Surface Mount Device, Body 12.7 x 9.09 mm, Pitch 1.27 mm", Package Reference=SMT, Standard Package=40, Category=Transformers, Datasheet URL=http://productfinder.pulseeng.com/products/datasheets/HX1188FNL.pdf;jsessionid=D0CB5525A348FF42F5E5BE320CB10324, Datasheet Version="Rev. B, 05/2014", Family=PulseTransformers, Height - Seated (Max)=5.99mm, Manufacturer URL=http://www.pulseelectronics.com/, Mounting Technology=SurfaceMount, Mounting Type=SurfaceMount, Online Catalog=HX1188, Other Names=553-2200, Other Related Documents=PackagesFNLvs.NL, PartNumber=HX1188FNL, Size / Dimension=12.70mmLx9.00mmW, Transformer Type=IsolationandDataInterface(Encapsulated), Turns Ratio - Primary=Secondary:1:1Transmitter,1:1Receiver
U25: library part CMP-04948-000003-1, "LOW-POWER HIGH-ACCURACY ANALOG O", Ambient Temperature Range High=+150°C, Ambient Temperature Range Low=-40°C, Manufacturer="Texas Instruments", Manufacturer Part Number=TMP235A2DBZR, Max Supply Voltage=5.5V, Min Supply Voltage=2.3V, Operating Supply Current=9uA, Output Current=500uA, Package=DBZ0003A, Temperature="-40°C to +150°C", Accuracy=0.5%, Automotive=No, Category=IC, ComponentLink2Description=Datasheet, ComponentLink2URL=http://www.ti.com/lit/ds/symlink/tmp235.pdf, Device Class L1=Sensors, Device Class L2="Temperature and Humidity Sensors", Device Class L3=unset, Digikey Description="LOW-POWER HIGH-ACCURACY ANALOG O", Height=1.12mm, Lead Free=Yes, Max Junction Temp=+150°C, Mouser Description="±2°C Analog output temperature sensor, with 10mV /°C gain 3-SOT-23 -40 to 150", Octopart=https://octopart.com/tmp235a2dbzr-texas+instruments-94966376, RoHS=TRUE, Sensor Output="Analog Voltage", Standoff Height=0.01mm, Temperature Range High=+150°C, Temperature Range Low=-40°C
D1 D2 D3 D4 D5 D6 D7 D8: LatestRevisionDate=08-Jul-2005, LatestRevisionNote="Mech Layer 1 removed.", PackageDescription="LED; 2 Leads", PackageReference=LED-0, Published=8-Jun-2000, Publisher="Altium Limited"
J1: Supplier 1=Mouser
L1 L2 L3: Code_IEC=1005, Code_JEITA=0402, LatestRevisionDate=29-May-2009, LatestRevisionNote="IPC-7351 Footprint Added.", PackageDescription="Chip Inductor", PackageReference=0402-A, Published=8-Jun-2000, Publisher="Altium Limited"

## Free pads (board coordinates)
  round 130 hole 130 unplated: 5(175.5,2964.5) 6(175.5,564.5) 7(4575.5,564.5) 8(4575.5,2964.5)

## Via types
v1: diameter 18, hole 8, Top Layer to Bottom Layer, tented both sides, 102 vias
v2: diameter 19.68, hole 7.87, Top Layer to Bottom Layer, tented both sides, 9 vias
v3: diameter 18, hole 10, Top Layer to Bottom Layer, tented both sides, 1 vias

## Nets (pads, with @x,y where several pads share a name; then routed paths per layer and width w, separated by ;. In a path a pad name is that pad's centre, name@x,y a point inside that pad or via, vN(x,y) a via of type N, cw(c..) or ccw(c..) an arc to the next point about the centre after c; other vN are vias at no path point)
1V8: J1.0 J14.1 J19.1 J20.1 R3.2 | length 840.7
  Top Layer w5: 821,3134.59 978.03,2977.56 R3.2@980,2977.56
  Top Layer w30: J14.1@715,2845 821,2951 821,3134.59 J1.0@821,3417.75